# Altium PCB air qulity monitor.PcbDoc
Units mil, origin at the board's own origin, x right, y up, seen from the top; angles counter-clockwise.
Board outline 2245 x 1820 mil, 2 copper layers (Top Layer, Bottom Layer); 22 components, 21 nets, 101 pads, 12 vias.
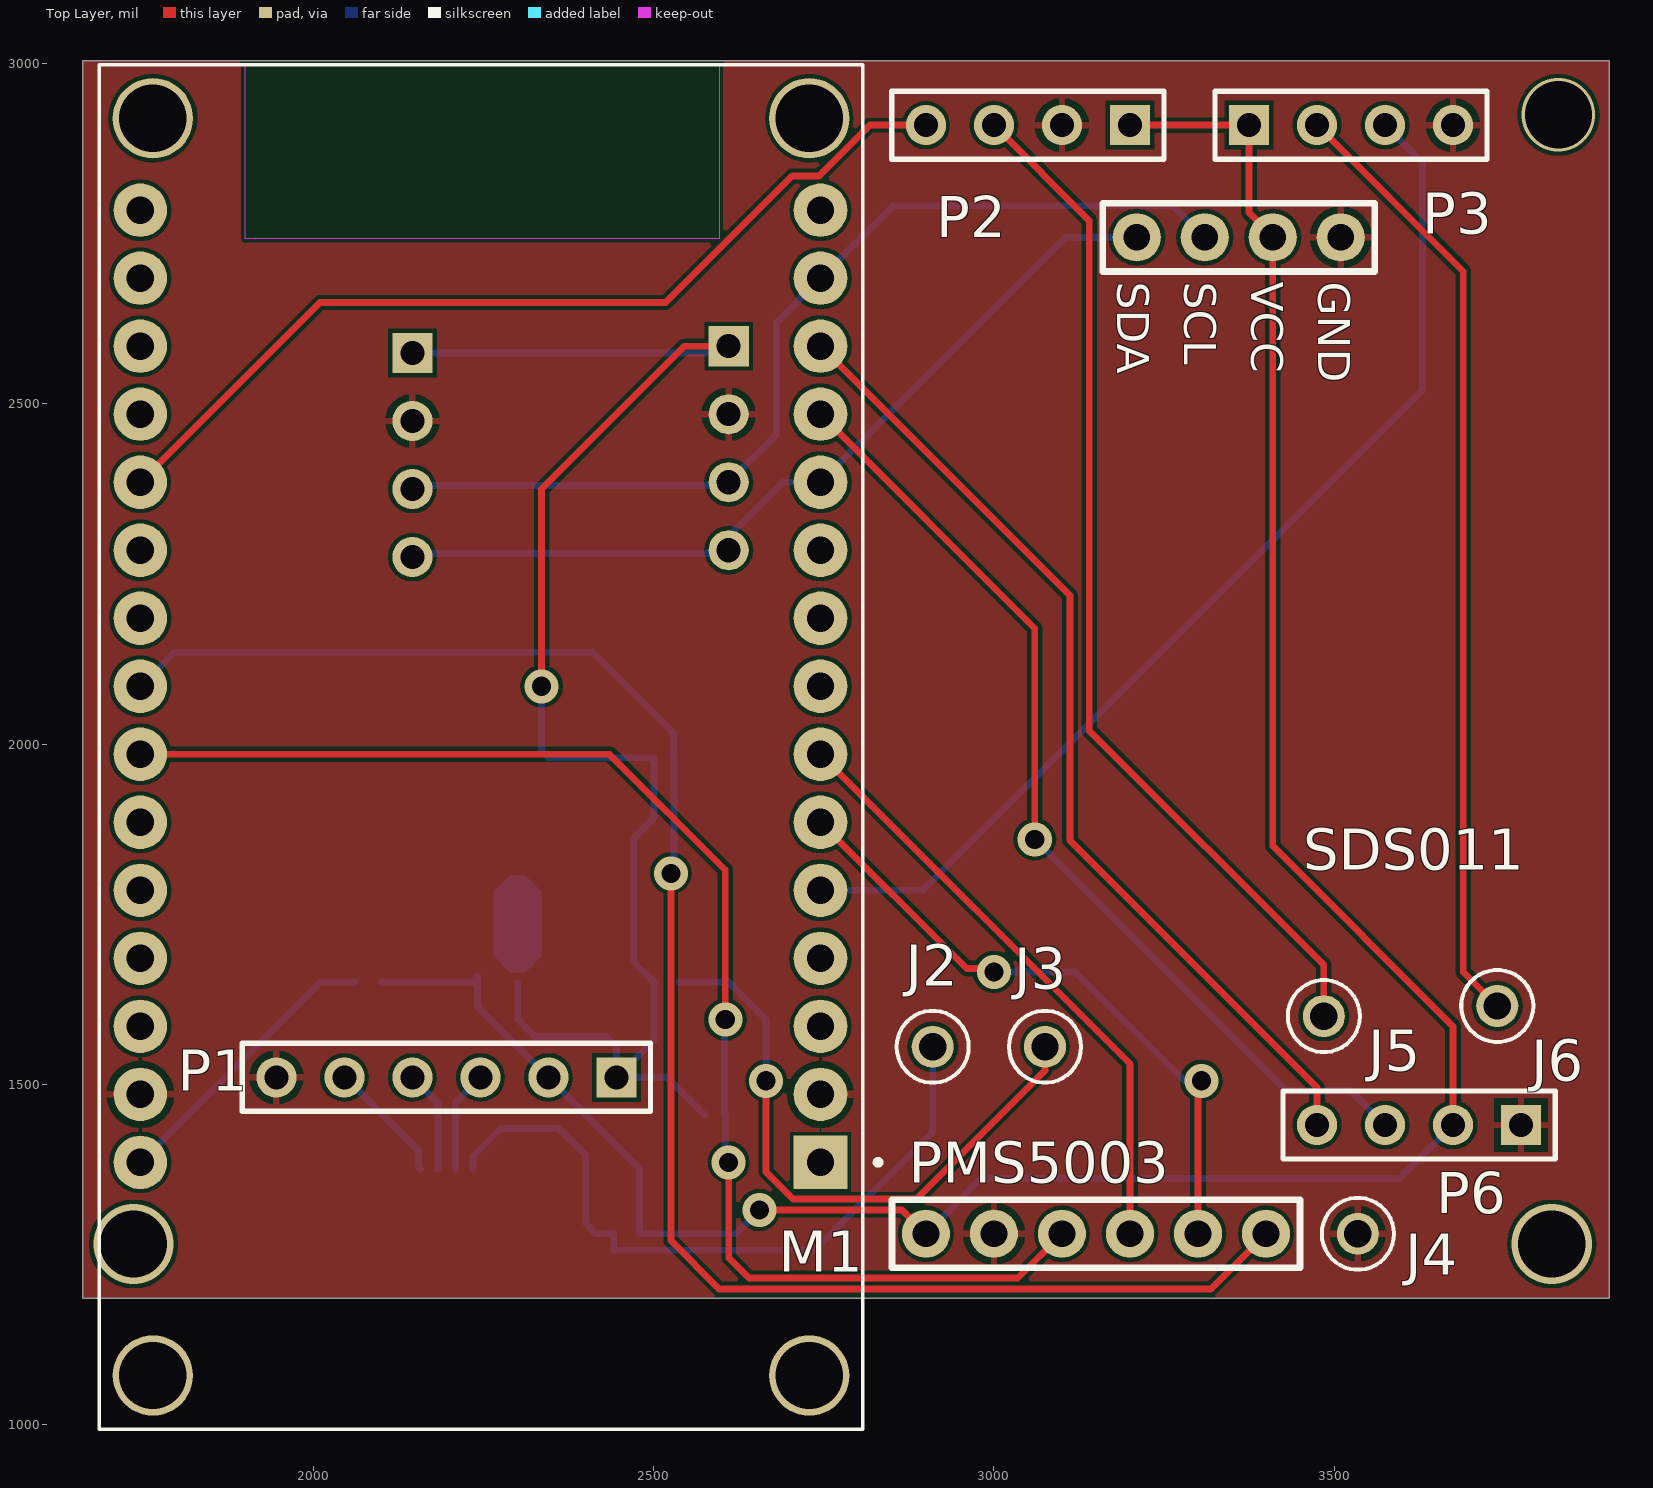
[diagram p0: Top Layer view]
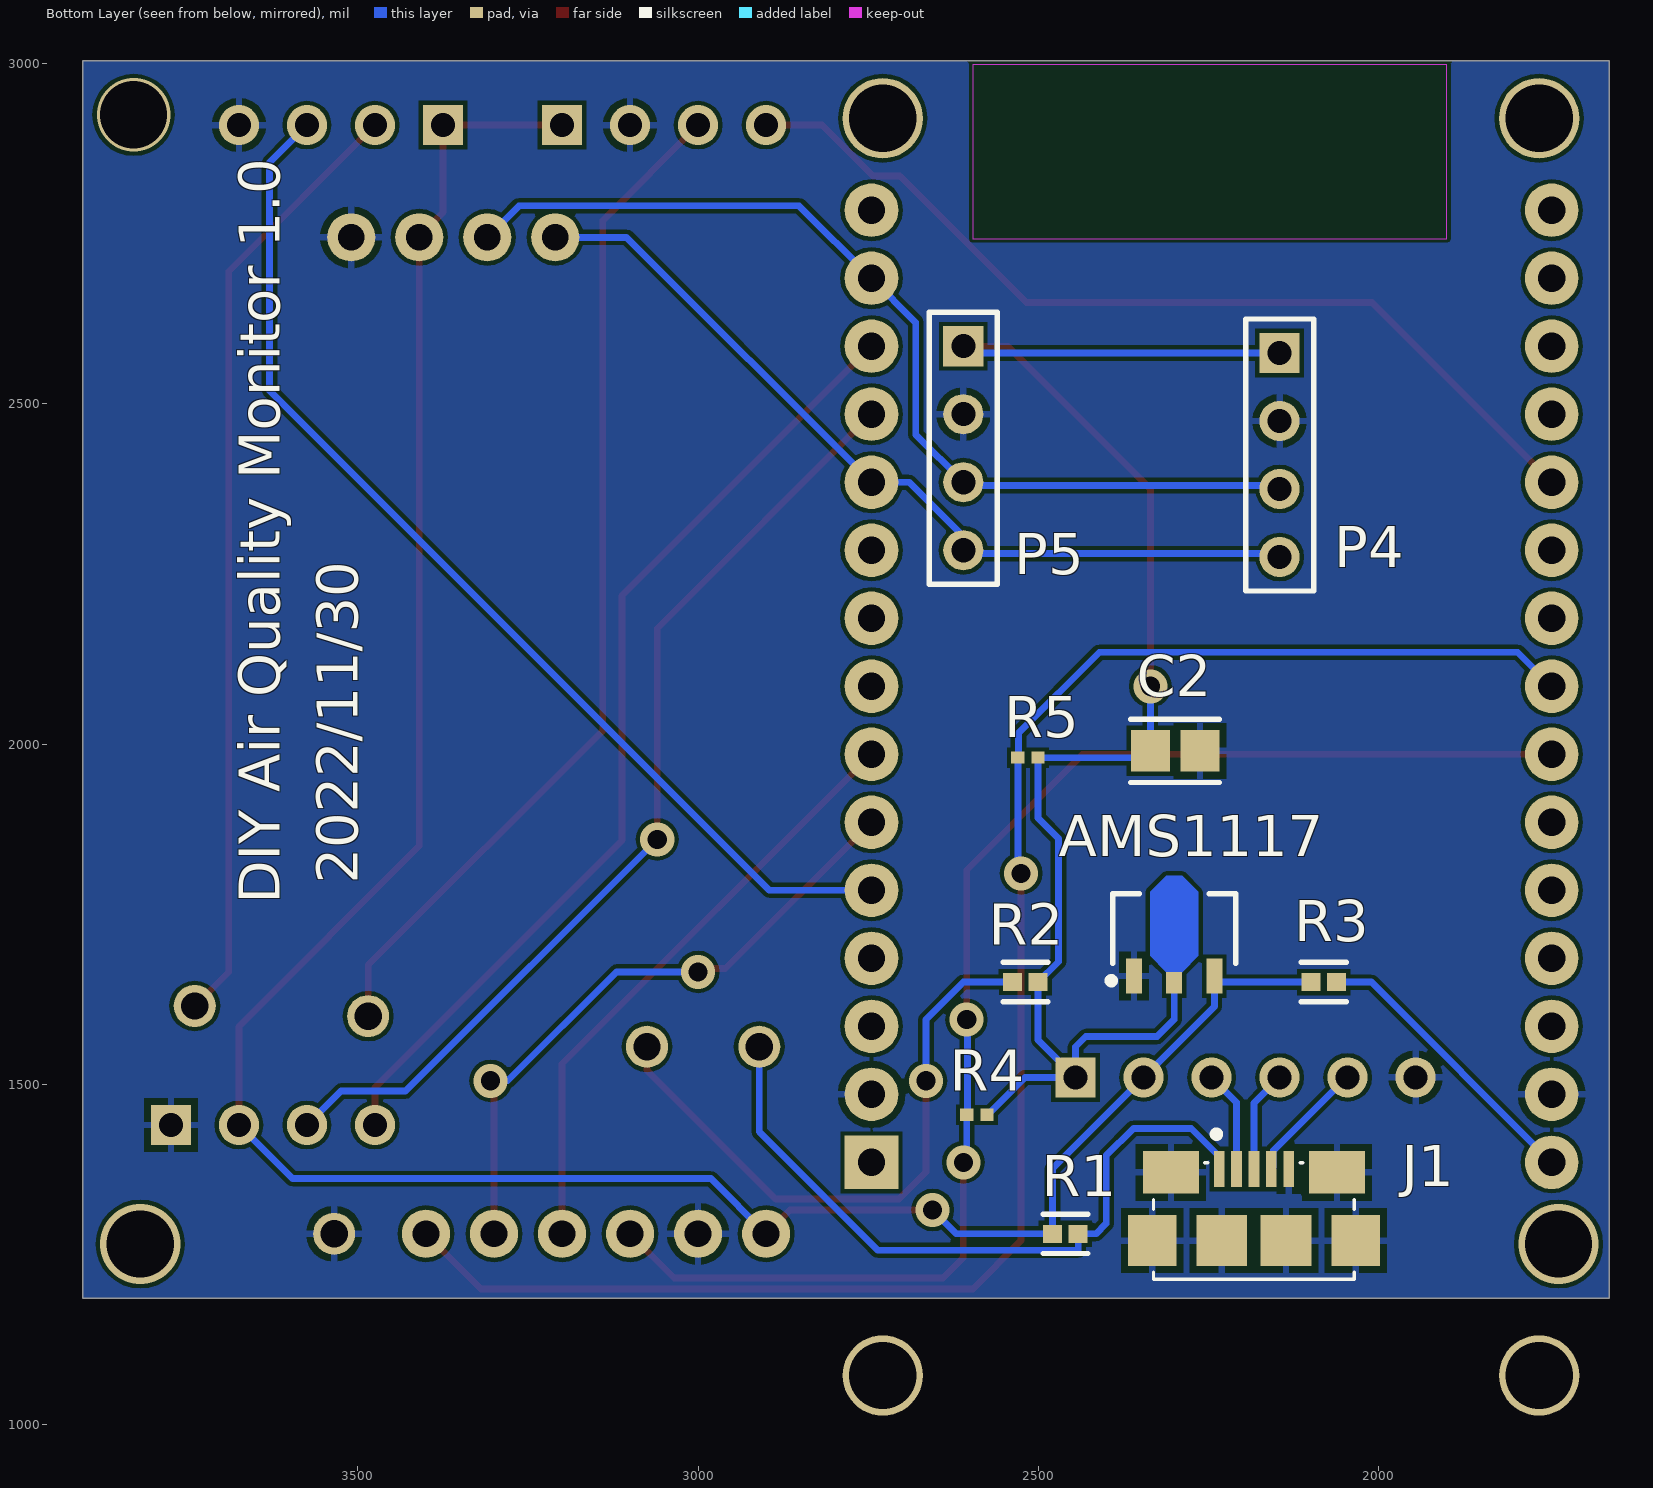
[diagram p1: Bottom Layer view, seen from below]
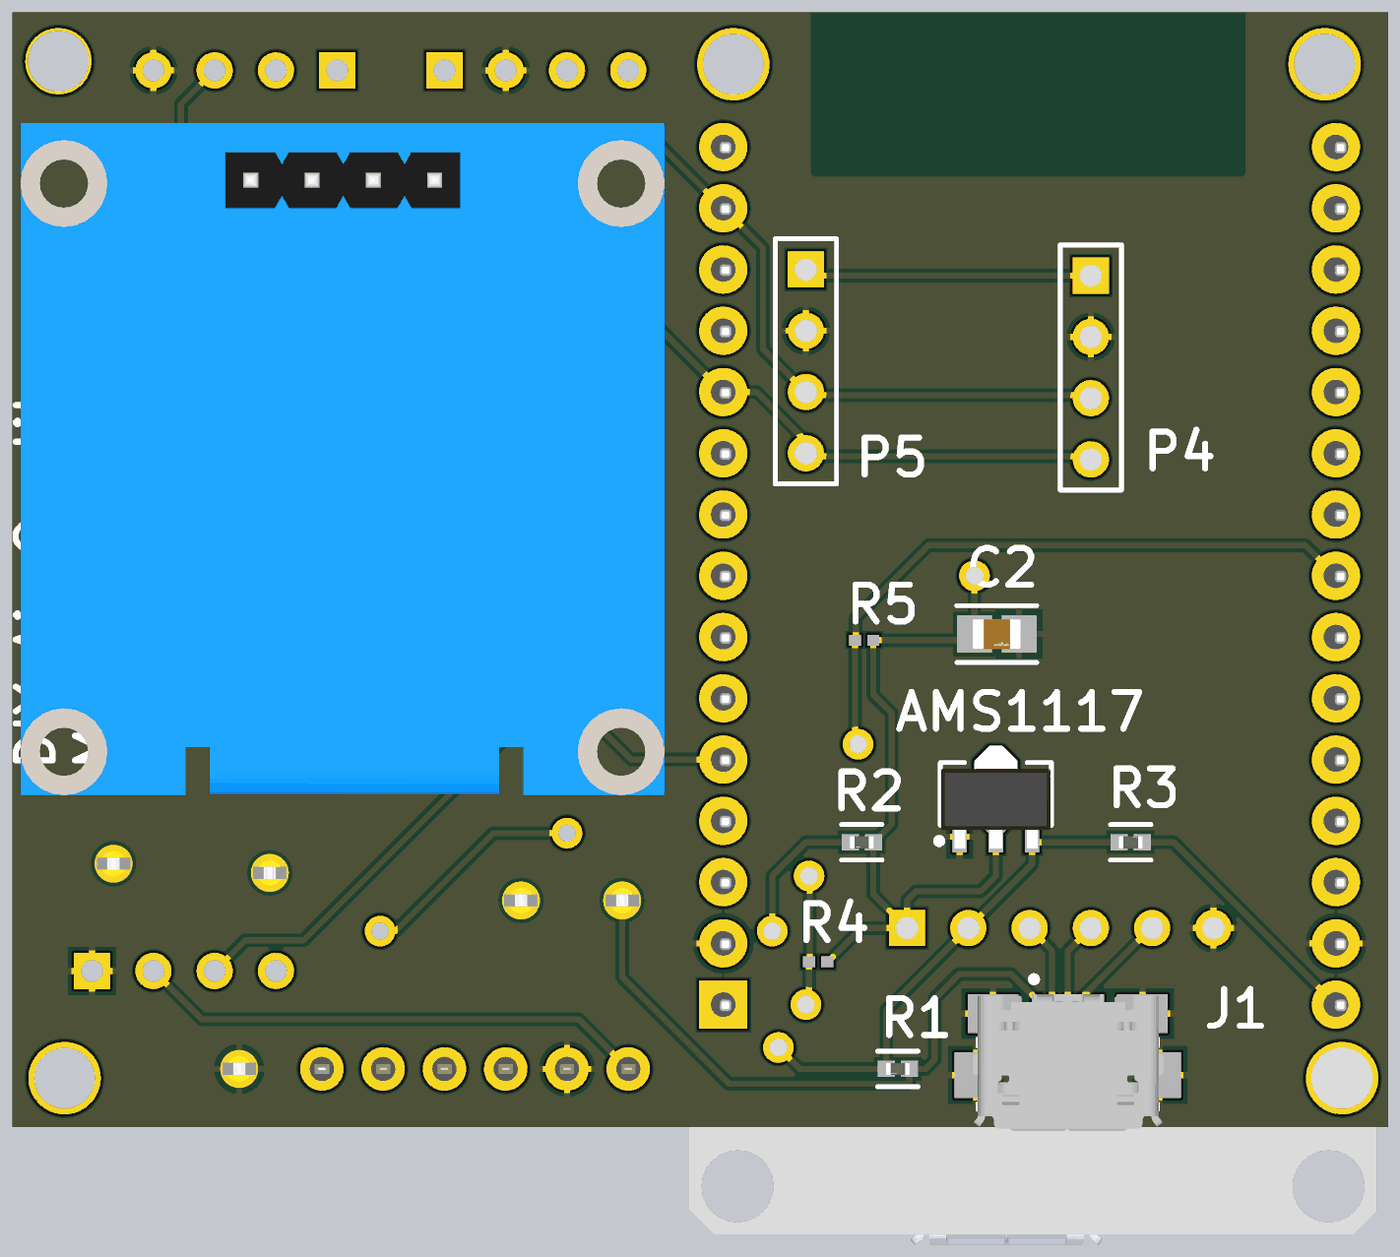
[diagram p2: 3D render of the assembled board from below, using the file's embedded part models]

## Layer stack, top to bottom
Top Solder: solder mask 0.4, Solder Resist, Dk 3.5
Top Layer: signal copper 1.4
Dielectric 1: dielectric 12.6, FR-4, Dk 4.8
Bottom Layer: signal copper 1.4
Bottom Solder: solder mask 0.4, Solder Resist, Dk 3.5

## Board outline
1660,1185 3905,1185 3905,3005 1660,3005

## Design rules (kind name [scope] priority, off if disabled: settings)
Clearance [All] p1: gap=5.98 ignorepadtopadclearanceinfootprint=FALSE
MinimumSolderMaskSliver [All] p1: minsoldermaskwidth=0.98
PolygonConnect [All] p1: connectstyle=Relief reliefconductorwidth=10 reliefentries=4 polygonreliefangle="90 Angle" airgapwidth=10
RoutingVias [All] p1: holewidth=28 width=50 viastyle="Through Hole" minholewidth=28 minwidth=50 maxholewidth=28 maxwidth=50
SilkToSilkClearance [All] p1: silktosilkclearance=1
SilkToSolderMaskClearance [IsPad] p1: minsilkscreentomaskgap=5 clearancetoexposedcopper=TRUE
SolderMaskExpansion [All] p1: expansion=4.02
Width [All] p1: maxlimit=12.01 minlimit=5.98 preferedwidth=10
27 further rules are at their usual default settings.

## Classes and differential pairs
component class "air qulity monitor": J5 J6 P1 P2 P3 P4 P5 P6 PMS5003 R3 R4 R5 SDS011
component class "5V to 3.3V regulator": AMS1117 C2 J1 J2 J3 J4 J? R1 R2

## Components (designator, comment, footprint, x,y, rotation, side; value= is the part's Value field where it differs from the comment)
AMS1117 "IC1" SOT89-150P350X150-3N 2300,1720 r90 bottom
C2 "22uF" FP-GRM219-0_2-0_15-IPC_A 2298.55,1990 r180 bottom
J1 "10118192-0001LF" AMPHENOL_10118192-0001LF 2182.76,1375.32 r180 bottom
J2 "5004" FP-5004-MFG 2910,1555 r0 top
J3 "5004" FP-5004-MFG 3075,1555 r0 top
J4 "5004" FP-5004-MFG 3535,1280 r0 top
J5 "5004" FP-5004-MFG 3485,1600 r0 top
J6 "5004" FP-5004-MFG 3740,1615 r0 top
M1 "ESP32-WROOM-32" ESP32-DEVKIT-V1 2268.7,1988.98 r180 top
P1 "Header 6" HDR1X6 2445,1510 r180 top
P2 "MQ7 sensor Header" HDR1X4 3200,2910 r180 top
P3 "MQ131 sensor Header" HDR1X4 3375,2910 r0 top
P4 "Si7021 Sensor Header" HDR1X4 2145,2575 r270 bottom
P5 "SGP30 Sensor Header" HDR1X4 2610,2585 r270 bottom
P6 "ZE08-CH2O sensor Header" HDR1X4 3775,1440 r180 top
PMS5003 "PMS5003 PM2.5 Sensor" "PMS5003 PM2.5 Sensor" 3150,1280 r90 top (schematic designator "PMS5003 PM2.5 Sensor")
R1 "0R" FP-RC0402-0_4-IPC_A 2460,1280 r0 bottom
R2 "0R" FP-RC0402-0_4-IPC_A 2518.84,1650 r0 bottom
R3 "0R" FP-RC0402-0_4-IPC_A 2080,1650 r180 bottom
R4 "10kΩ" RESC1005X40X25LL05T10 2590,1455 r180 bottom value=10kO
R5 "10kΩ" RESC1005X40X25LL05T10 2515,1980 r180 bottom value=10kO
SDS011 "Pin Header x4 - Display" dispay 3510,2745 r270 top

## Footprints (in the part's own frame and the unit in brackets; to place one, negate y for a bottom-side part, rotate by r counter-clockwise, add the part's x,y. Pads: shape width x height; smd on the part's side, far side on the other; paste and mask are expansions set on the pad)
AMPHENOL_10118192-0001LF [mm]
  rect 0.4x1.35 smd: 1(-1.3,0) 2(-0.65,0) 3(0,0) 4(0.65,0) 5(1.3,0)
  rect 2.1x1.6 smd: SH1(-3.1,-0.125) SH2(3.1,-0.125)
  rect 1.8x1.9 smd: SH3(-3.8,-2.675) SH6(3.8,-2.675)
  rect 1.9x1.9 smd: SH4(-1.2,-2.675) SH5(1.2,-2.675)
  silkscreen extent -3.75,-4.12 3.75,1.4, body extent -3.94,-4.99 3.98,0.67, height 3.09
dispay [mm] "Pin Header x4 - Display"
  round 1.8 hole 1: GND(0,0) SCL(0,-5.08) SDA(0,-7.62) VCC(0,-2.54)
  silkscreen extent -1.27,-8.89 1.27,1.27, body extent -2,-17 25.86,9.7, height 1.47
ESP32-DEVKIT-V1 [mm]
  rect 2x2 hole 1.02: 1(-12.098,15.341)
  round 2 hole 1.02: 2(-12.098,12.801) 3(-12.098,10.261) 4(-12.098,7.721) 5(-12.098,5.181) 6(-12.098,2.641) 7(-12.098,0.101) 8(-12.098,-2.439) 9(-12.098,-4.979) 10(-12.098,-7.519) 11(-12.098,-10.059) 12(-12.098,-12.599) 13(-12.098,-15.139) 14(-12.098,-17.679) 15(-12.098,-20.219) 16(13.302,-20.219) 17(13.302,-17.679) 18(13.302,-15.139) 19(13.302,-12.599) 20(13.302,-10.059) 21(13.302,-7.519) 22(13.302,-4.979) 23(13.302,-2.439) 24(13.302,0.101) 25(13.302,2.641) 26(13.302,5.181) 27(13.302,7.721) 28(13.302,10.261) 29(13.302,12.801) 30(13.302,15.341)
  round 3 hole 2.517 unplated: ""(-11.678,23.301) ""(-11.678,-23.649) ""(12.832,23.301) ""(12.832,-23.649)
  Keep-Out Layer region: 9.382,-25.649 -8.308,-25.649 -8.308,-19.159 9.382,-19.159
  Keep-Out Layer region: 9.382,-25.649 -8.308,-25.649 -8.308,-19.159 9.382,-19.159
  Keep-Out Layer region: 9.382,-25.649 -8.308,-25.649 -8.308,-19.159 9.382,-19.159
  silkscreen extent -14.35,-25.65 14.83,25.3, body extent -13.5,-25.63 15,25.3, height 7.2
FP-5004-MFG [mm]
  round 1.57 hole 1.02 paste-1000 mask+0: 1(0,0)
  silkscreen extent -1.35,-1.34 1.35,1.34, body extent -1.26,-1.27 1.27,1.27, height 4.72
FP-GRM219-0_2-0_15-IPC_A [mil]
  rect 57.27x61.27 smd paste+0 mask+0: 1(-36.45,0) 2(36.45,0)
  silkscreen extent -65,-46 65,46, body extent -39,-25 39,25, height 39
FP-RC0402-0_4-IPC_A [mil]
  rect 28.16x26.48 smd paste+0 mask+0: 1(-18.84,0) 2(18.84,0)
  silkscreen extent -33,-29 33,29, body extent -20,-10 20,10, height 16
HDR1X4 [mm] "Connector; Header; 4 Position"
  rect 1.5x1.5 hole 0.9: 1(0,0)
  round 1.5 hole 0.9: 2(2.54,0) 3(5.08,0) 4(7.62,0)
  silkscreen extent -1.27,-1.27 8.89,1.27
HDR1X6 [mm] "Connector; Header; 6 Position"
  rect 1.5x1.5 hole 0.9: 1(0,0)
  round 1.5 hole 0.9: 2(2.54,0) 3(5.08,0) 4(7.62,0) 5(10.16,0) 6(12.7,0)
  silkscreen extent -1.27,-1.27 13.97,1.27
"PMS5003 PM2.5 Sensor" [mm] "PMS5003 PM2.5 Sensor"
  round 1.8 hole 1: GND(0,3.81) RESET(0,-6.35) RX(0,-1.27) SET(0,1.27) TX(0,-3.81) VCC(0,6.35)
  silkscreen extent -1.27,-7.62 1.27,7.62, body extent -1.27,-7.62 1.27,7.62, height 8.5
RESC1005X40X25LL05T10 [mm] "Chip Resistor, 2-Leads, Body 1.00x0.50mm, IPC High Density"
  rect 0.5x0.45 smd: 1(-0.375,0) 2(0.375,0)
  body extent -0.53,-0.27 0.53,0.28, height 0.4
SOT89-150P350X150-3N [mm] "SOT89, 3-Leads, Body 4.50x2.50mm, Pitch 1.50mm, Lead Span 3.5mm, IPC Medium Density"
  rect 1.3x0.6 smd: 1(-1.55,1.5) 3(-1.55,-1.5)
  rect 0.8x0.6 smd: 2(-1.8,0)
  Top Layer region: -1.4,0.3 -0.8,0.9 1.6,0.9 2.2,0.3 2.2,-0.3 1.6,-0.9 -0.8,-0.9 -1.4,-0.3
  silkscreen extent -1.85,-2.3 1.53,2.48, body extent -2.02,-2.27 2.23,2.27, height 1.5

## Part data
AMS1117: library part IC?, "75dB@(120Hz) 1A 1.25V@(1A) ±125?@(Tj) Fixed 3.3V~3.3V Positive 1 20V SOT-89 Linear Voltage Regulators (LDO) ROHS", LCSC Part #=C2904742, Manufacturer=YONGYUTAI, Mfr. Part #=AMS1117-3.3, Package=SOT-89, Datasheet=https://datasheet.lcsc.com/lcsc/2110121330_YONGYUTAI-AMS1117-3-3_C2904742.pdf
C2: library part CMP-06035-056251-1, "Chip Multilayer Ceramic Capacitors for General Purpose, 0805, 22uF, X5R, 15%, 20%, 16V", LCSC Part #=C162295, Manufacturer="Murata Electronics", Mfr. Part #=GRM219R61C226ME15L, Package=0805, Datasheet=https://datasheet.lcsc.com/lcsc/1811141821_Murata-Electronics-GRM219R61C226ME15L_C162295.pdf
J1: "Single Port 5 Contact Horizontal Right Angle Shielded Micro B USB 2.0 Connector", Package=None, Availability=Unavailable, MP=10118192-0001LF, Price=None
J2 J3 J4 J5 J6: library part CMP-2000-05575-2, "PC TEST POINT MINIATURE YELLOW", LCSC Part #=C2906762, Manufacturer=Keystone, ComponentLink2Description=Datasheet, ComponentLink2URL=https://www.keyelco.com/product-pdf.cfm?p=1313, Datasheet=https://datasheet.lcsc.com/lcsc/2201121200_Keystone-5004_C2906762.pdf, Mfr. Part #=5004, Package=5004
M1: library part ESP32-DEVKIT-V1, "Dual core, Wi-Fi: 2.4 GHz up to 150 Mbits/s,BLE (Bluetooth Low Energy) and legacy Bluetooth, 32 bits, Up to 240 MHz"
P1: "Header, 6-Pin", LatestRevisionDate=17-Jul-2002, LatestRevisionNote="Re-released for DXP Platform.", Publisher="Altium Limited"
P2 P3 P4 P5 P6: library part "Header 4", "Header, 4-Pin", LatestRevisionDate=17-Jul-2002, LatestRevisionNote="Re-released for DXP Platform.", Publisher="Altium Limited"
R1 R2 R3: library part CMP-2002-07342-2, "RES SMD 0 OHM JUMPER 1/16W 0402", LCSC Part #=C106231, Manufacturer=Yageo, Mfr. Part #=RC0402FR-070RL, Package=0402, Datasheet=https://www.lcsc.com/product-detail/Chip-Resistor-Surface-Mount_YAGEO-RC0402FR-070RL_C106231.html
R4 R5: library part CMP-2002-07353-1, "62.5mW 50V ±100ppm/? ±1% -55?~+155? 10kO 0402 Chip Resistor - Surface Mount ROHS", LCSC Part #=C60490, Manufacturer="Yageo / Phycomp", Mfr. Part #=RC0402FR-0710KL, Package=0402, Datasheet=https://datasheet.lcsc.com/lcsc/1809301715_YAGEO-RC0402FR-0710KL_C60490.pdf

## Via types
v1: diameter 50, hole 28, Top Layer to Bottom Layer, 9 vias
v2: diameter 118.11, hole 99.11, Top Layer to Bottom Layer, 2 vias
v3: diameter 108.11, hole 99.11, Top Layer to Bottom Layer, 1 vias

## Nets (pads, with @x,y where several pads share a name; then routed paths per layer and width w, separated by ;. In a path a pad name is that pad's centre, name@x,y a point inside that pad or via, vN(x,y) a via of type N, cw(c..) or ccw(c..) an arc to the next point about the centre after c; other vN are vias at no path point)
3.3V: AMS1117.2 C2.1 P1.1 P4.1 P5.1 R2.1 R4.2 R5.2 | length 2317
  Top Layer w10: v1(2335,2085) 2335,2375 2545,2585 P5.1
  Bottom Layer w10: P4.1 2600,2575 P5.1 ; AMS1117.2 2300,1595 2325,1570 2430,1570 2445,1555 P1.1 ; v1(2335,2085) C2.1 2345,1980 R5.2 2500.24,1891.23 2470,1860.99 2470,1680 R2.1 2500,1565 P1.1 ; R4.2 2574.25,1455 2519.25,1510 P1.1
5V: AMS1117.3 P1.2 P2.1 P3.1 P6.2 PMS5003.VCC R1.2 R3.1 SDS011.VCC | length 3683.1
  Top Layer w10: v1(2655,1315) 2865,1315 PMS5003.VCC ; P2.1 P3.1 3375,2781.32 3410,2746.32 SDS011.VCC 3410,1850 3675,1585 P6.2
  Bottom Layer w10: R3.1 2234.13,1650 AMS1117.3@2240.94,1656.81 ; AMS1117.3 AMS1117.3@2240.94,1656.81 ; v1(2655,1315) 2620,1280 R1.2 2478.84,1376.16 P1.2 2240.94,1614.06 AMS1117.3@2240.94,1656.81 ; PMS5003.VCC 2981.13,1361.13 3596.13,1361.13 P6.2
D+: J1.3 P1.4 | length 150.3
  Bottom Layer w10: P1.4 2182.76,1472.24 J1.3
D-: J1.2 P1.3 | length 149.9
  Bottom Layer w10: J1.2 2208.35,1473.35 P1.3
DOUT1: J5.1 P2.3 | length 1510.9
  Top Layer w10: P2.3 3140,2770 3140,2020 3485,1675 J5.1
DOUT2: J6.1 P3.2 | length 1404.8
  Top Layer w10: P3.2 3690,2695 3690,1665 J6.1
GND: AMS1117.1 C2.2 J1.5 J1.SH1 J1.SH2 J1.SH3 J1.SH4 J1.SH5 J1.SH6 J4.1 M1.2 M1.29 P1.6 P2.2 P3.4 P4.2 P5.2 P6.1 PMS5003.GND SDS011.GND
ID: J1.4 P1.5 | length 182.2
  Bottom Layer w10: P1.5 2046.87,1510 2154.29,1402.58 2154.29,1378.19 J1.4
NetJ1_1: J1.1 J2.1 R1.1 | length 1055.9
  Bottom Layer w10: J1.1 2233.94,1394.02 2274.92,1435 2360,1435 2400,1395 2400,1295 2415,1280 R1.1 2441.16,1255.78 2735.78,1255.78 2750,1270 2910,1430 J2.1
NetJ3_1: J3.1 R2.2 | length 914.1
  Top Layer w10: v1(2665,1505) 2665,1370.73 2704.74,1330.98 2885.98,1330.98 3075,1520 J3.1
  Bottom Layer w10: R2.2 2610,1650 2665,1595 v1(2665,1505)
NetM1_5: M1.5 P3.3 | length 1602.2
  Bottom Layer w10: M1.5 2895,1785 3630,2520 3630,2855 P3.3
NetM1_6: M1.6 PMS5003.TX | length 944.5
  Top Layer w10: M1.6 2960,1670 2995,1670 v1(3000,1665) ; PMS5003.TX 3300,1500 v1(3305,1505)
  Bottom Layer w10: v1(3000,1665) 3120,1665 3280,1505 v1(3305,1505)
NetM1_7: M1.7 PMS5003.RX | length 893.5
  Top Layer w10: M1.7 3200,1530 PMS5003.RX
NetM1_12: M1.12 P6.3 | length 1444.4
  Top Layer w10: M1.12 3060,2170 v1(3060,1860)
  Bottom Layer w10: v1(3060,1860) 3430,1490 3525,1490 P6.3
NetM1_13: M1.13 P6.4 | length 1447.4
  Top Layer w10: M1.13 3111.88,2218.12 3111.88,1858.12 3475,1495 P6.4
NetM1_20: M1.20 P2.4 | length 1372.5
  Top Layer w10: M1.20 2009.38,2649.38 2517.44,2649.38 2703.41,2835.35 2742.83,2835.35 2817.47,2910 P2.4
NetM1_23: M1.23 PMS5003.RESET R5.1 | length 2540.8
  Top Layer w10: v1(2525,1810) 2525,1270 2595.98,1199.02 3319.02,1199.02 PMS5003.RESET
  Bottom Layer w10: M1.23 1795,2135 2410,2135 2528.78,2016.22 2528.78,1980 R5.1 2529.76,1814.76 v1(2525,1810)
NetM1_24: M1.24 PMS5003.SET R4.1 | length 2033.3
  Top Layer w10: M1.24 2435,1985 2605,1815 v1(2605,1595) ; v1(2610,1385) 2610,1245 2640,1215 3035,1215 PMS5003.SET
  Bottom Layer w10: v1(2605,1595) 2603.86,1593.86 2603.86,1455 R4.1 2604.88,1454.88 2604.88,1390.12 v1(2610,1385)
NetM1_30: M1.30 R3.2 | length 425.9
  Bottom Layer w10: M1.30 2010,1650 R3.2
SCL: M1.14 P4.3 P5.3 SDS011.SCL | length 1453.4
  Bottom Layer w10: P4.3 2150,2380 2605,2380 P5.3 2680,2455 2680,2620 M1.14 2851.42,2791.42 3263.58,2791.42 SDS011.SCL
SDA: M1.11 P4.4 P5.4 SDS011.SDA | length 1271.4
  Bottom Layer w10: P4.4 2150,2280 2605,2280 P5.4 2610,2305 2690,2385 M1.11 3105,2745 SDS011.SDA
pads on no net: M1. M1.1 M1.3 M1.4 M1.8 M1.9 M1.10 M1.15 M1.16 M1.17 M1.18 M1.19 M1.21 M1.22 M1.25 M1.26 M1.27 M1.28
copper on no net:
  other v2: 1735,1265 3820,1265
  other v3: 3830,2925

## Polygon pours and split planes (outlines as drawn)
GND on Bottom Layer "GND_L02_P000" (solid, pour order 0): 1660,1185 3905,1185 3905,3005 1660,3005
GND on Top Layer "GND_L01_P001" (solid, pour order 1): 1660,1185 3905,1185 3905,3005 1660,3005

## Silkscreen, mask and mechanical layers (free items; w line width, h text height)
Bottom Overlay:
  text "2022/11/30" at 3500,1795 h60 r270
  text "DIY Air Quality Monitor 1.0" at 3615,1765 h60 r270
Mechanical 1:
  lines w10: 1665.91,3075.99 1665.91,3095.99 ; 1725.91,3065.99 1665.91,3085.99 ; 1725.91,3105.99 1665.91,3085.99 ; 2505,3085.99 1665.91,3085.99 ; 3066.83,3085.99 3905.91,3085.99 ; 3845.91,3065.99 3905.91,3085.99 ; 3845.91,3105.99 3905.91,3085.99 ; 3905.91,3075.99 3905.91,3095.99 ; 4000,1245.92 4020,1185.92 ; 4000,2955.92 4020,3015.92 ; 4010,1185.92 4030,1185.92 ; 4010,3015.92 4030,3015.92 ; 4020,1825 4020,1185.92 ; 4020,2376.83 4020,3015.92 ; 4040,1245.92 4020,1185.92 ; 4040,2955.92 4020,3015.92 ; 1665,1180 1665,3010 3905,3010 3905,1180 1665,1180
  text "2240 (mil)" at 2515,3050 h60
  text "1830 (mil)" at 3984.01,2366.83 h60 r270

## Text inside footprints (layer, text, board x,y; h text height)
SDS011: Top Overlay "GND" at 3476.54,2680.04 h47.24 r270; Top Overlay "VCC" at 3378.11,2680.04 h47.24 r270; Top Overlay "SCL" at 3279.68,2680.04 h47.24 r270; Top Overlay "SDA" at 3181.26,2680.04 h47.24 r270